# Altium PCB CW308T_M2351_MainPCB.PcbDoc
Units mil, origin at the board's own origin, x right, y up, seen from the top; angles counter-clockwise.
Board outline 2055 x 2540 mil, 2 copper layers (Top Layer, Bottom Layer); 24 components, 22 nets, 174 pads, 47 vias.
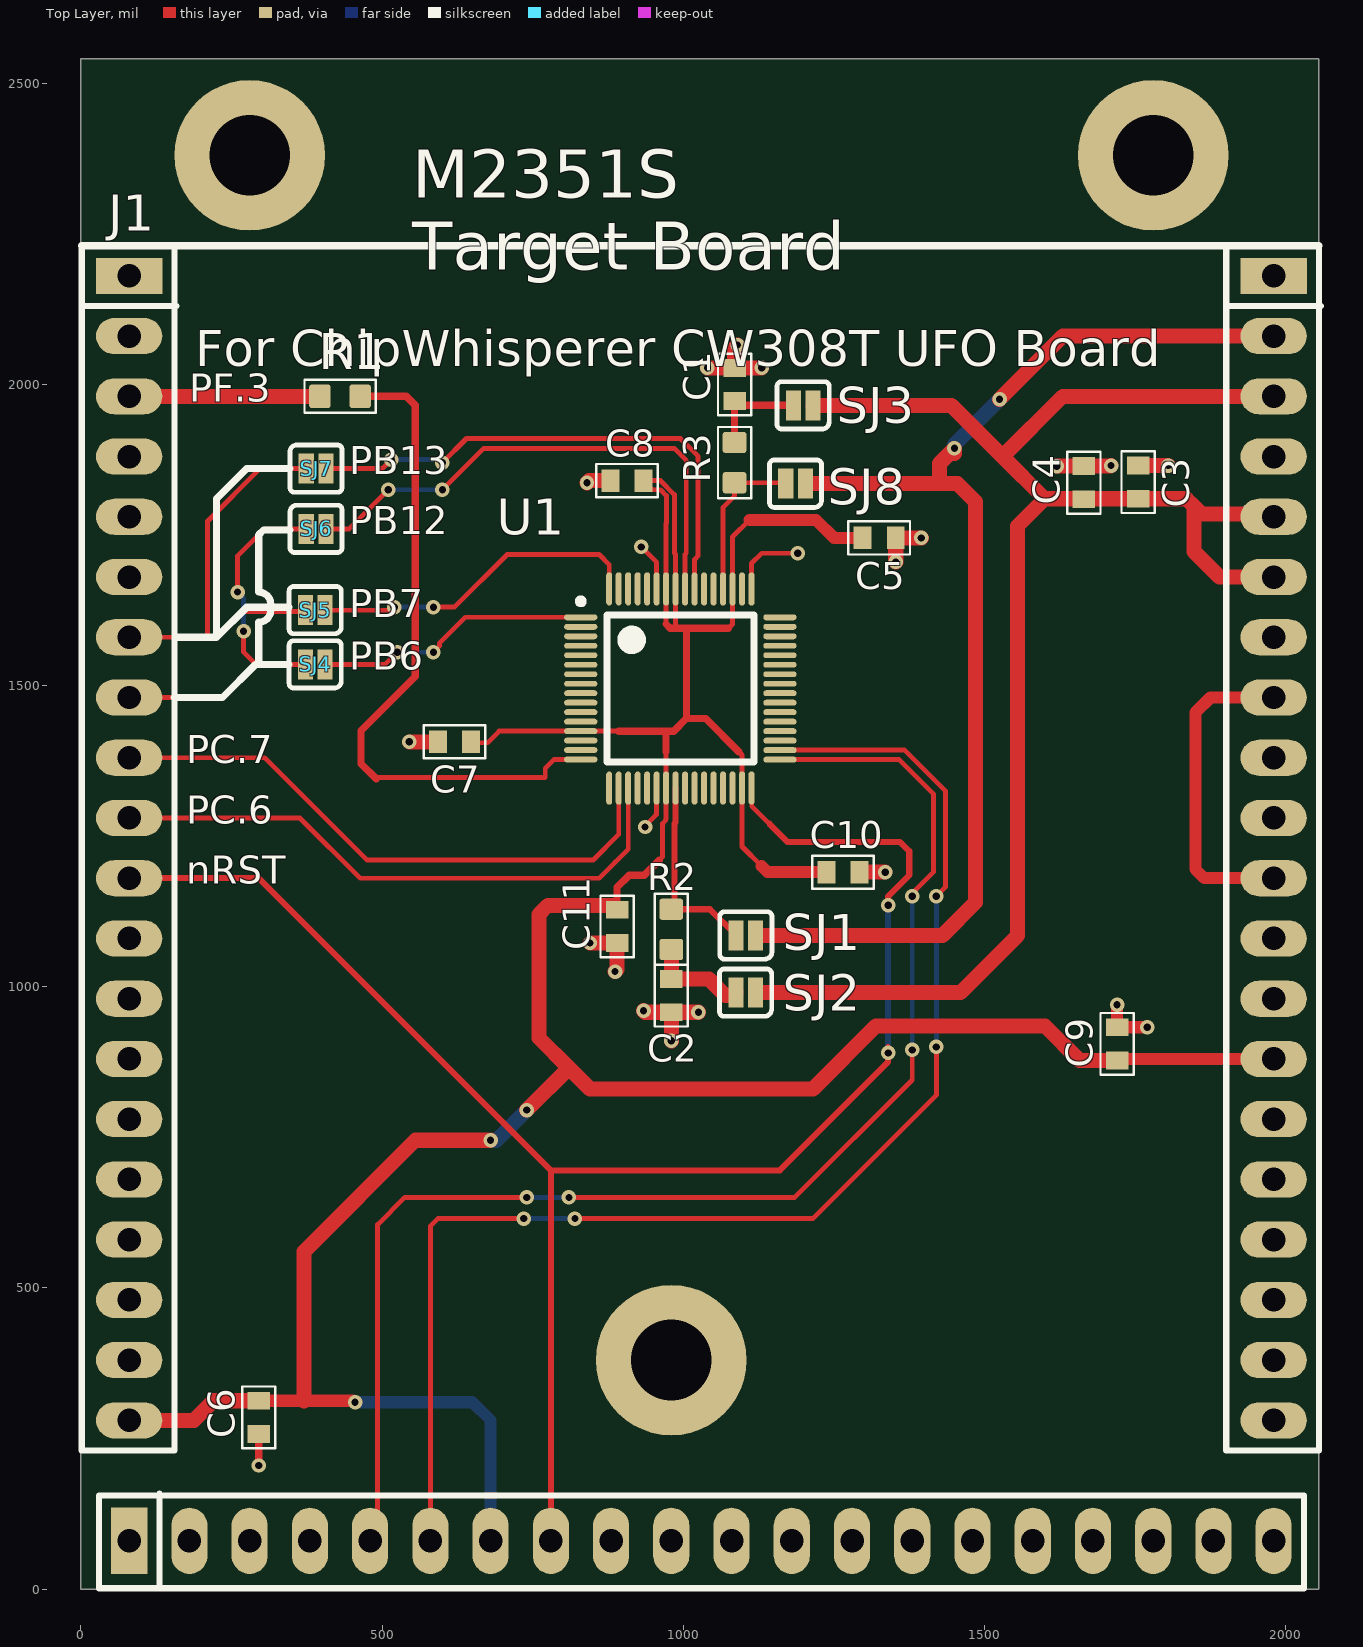
[diagram p0: Top Layer view]
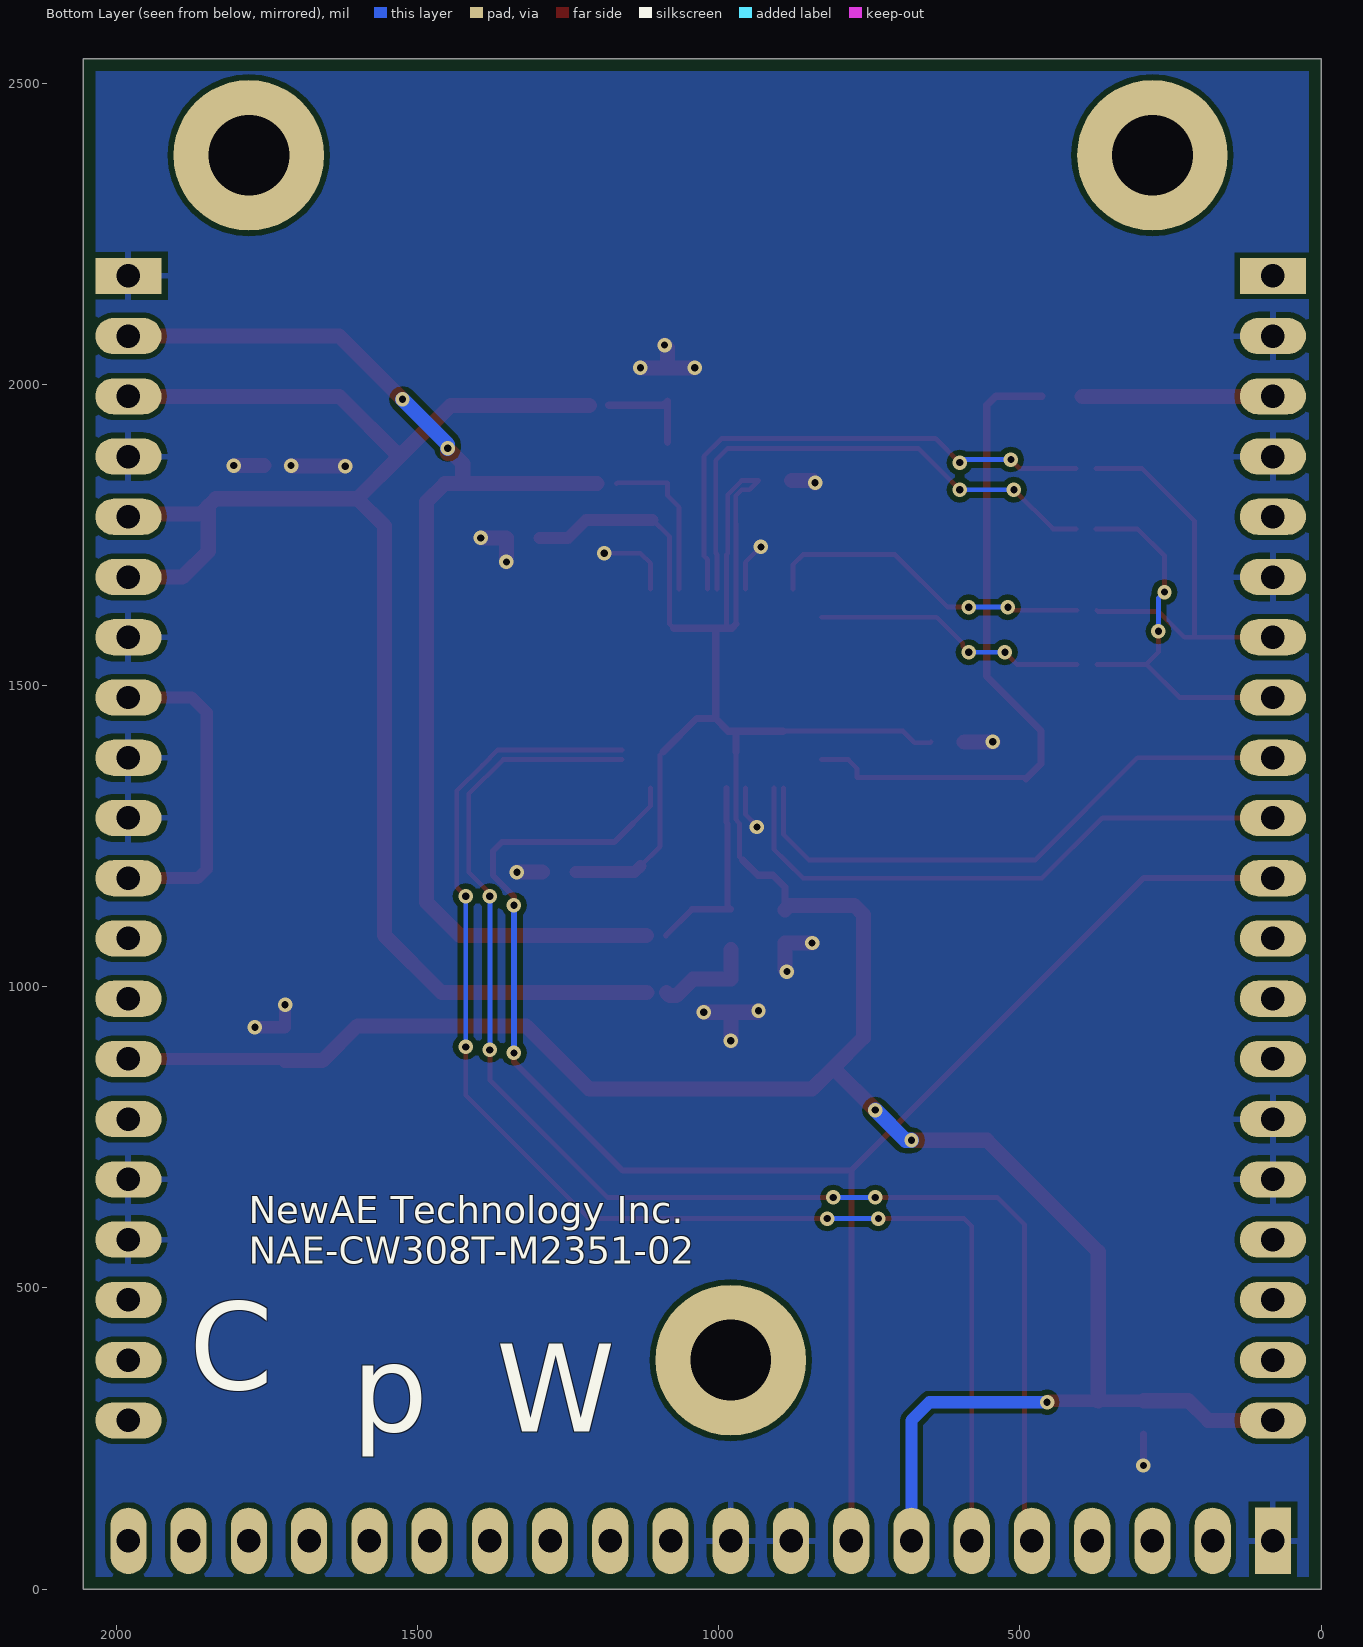
[diagram p1: Bottom Layer view, seen from below]

## Layer stack, top to bottom
Top Solder: solder mask 0.4, Solder Resist, Dk 3.5
Top Layer: signal copper 1.4
Dielectric 1: dielectric 12.6, FR-4, Dk 4.8
Bottom Layer: signal copper 1.4
Bottom Solder: solder mask 0.4, Solder Resist, Dk 3.5

## Board outline
0,0 2055,0 2055,2540 0,2540

## Design rules (kind name [scope] priority, off if disabled: settings)
BoardOutlineClearance Silk_to_Outline [(OnLayer('Top Overlay'))] p1: gap=0 ignorepadtopadclearanceinfootprint=FALSE
BoardOutlineClearance [All] p2: gap=20 ignorepadtopadclearanceinfootprint=FALSE
Clearance Clearance_Power [InNet('+*') OR InNet('-*') OR InNet('GND')] p1: gap=9 ignorepadtopadclearanceinfootprint=FALSE
Clearance [All] p2: gap=6 ignorepadtopadclearanceinfootprint=FALSE except(0: Arc-Hole Track-Hole SMDPad-Hole THPad-Hole Via-Hole Fill-Hole Poly-Hole Region-Hole Text-Hole)
HoleSize [All] p1: absolutevalues=TRUE maxlimit=200 minlimit=1 maxpercent=80.000 minpercent=20.000
MinimumSolderMaskSliver [All] p1: minsoldermaskwidth=5
PlaneConnect PlaneConnect_viaDirect [IsVia] p1: planeconnectstyle=Direct reliefexpansion=20 reliefentries=4 reliefconductorwidth=10 reliefairgap=10
PlaneConnect [All] p2: planeconnectstyle=Relief reliefexpansion=20 reliefentries=4 reliefconductorwidth=10 reliefairgap=10
PolygonConnect PolygonConnect_viaDirect [All vs isVia] p1: connectstyle=Direct reliefconductorwidth=10 reliefentries=4 polygonreliefangle="90 Angle" airgapwidth=10
PolygonConnect [All] p2: connectstyle=Relief reliefconductorwidth=10 reliefentries=4 polygonreliefangle="90 Angle" airgapwidth=10
RoutingVias [All] p1: holewidth=12 width=24 viastyle="Through Hole" minholewidth=12 minwidth=24 maxholewidth=28 maxwidth=100
SilkToSilkClearance [All] p1: silktosilkclearance=5
SilkToSolderMaskClearance [IsPad] p1: minsilkscreentomaskgap=5 clearancetoexposedcopper=TRUE
SolderMaskExpansion [All] p1: expansion=4
Width [All] p1: maxlimit=100 minlimit=6 preferedwidth=8 minimp=50.000000 maximp=50.000000 favimp=50.000000
25 further rules are at their usual default settings.

## Components (designator, comment, footprint, x,y, rotation, side; value= is the part's Value field where it differs from the comment)
C1 "2u2" CAPC0603_M 1085,1999.69 r90 top
C2 "2u2" CAPC0603_M 980,985 r270 top
C3 "100n" CAPC0603_M 1755,1837.44 r90 top
C4 "2u2" CAPC0603_M 1665,1836.54 r90 top
C5 "100n" CAPC0603_M 1325,1745 r0 top
C6 "100n" CAPC0603_M 295,285 r270 top
C7 "100n" CAPC0603_M 620,1406.42 r180 top
C8 "100n" CAPC0603_M 906.42,1840 r180 top
C9 "100n" CAPC0603_M 1720,905 r90 top
C10 "2u2" CAPC0603_M 1265,1190 r0 top
C11 "2u2" CAPC0603_M 890,1100 r270 top
J1 "CW308_TARGETCON" CW308_TBOARD_CONN 80,2180 r0 top locked
R1 "51R" RESC1608X55N 430,1980 r180 top
R2 "10R" RESC1608X55N 980,1095 r270 top
R3 "10R" RESC1608X55N 1085,1870 r90 top
SJ1 "NO" SJ_2S_NO 1103.78,1085 r180 top
SJ2 "NO" SJ_2S_NO 1103.27,990 r180 top
SJ3 "NO" SJ_2S_NO 1198.78,1965 r180 top
SJ4 "NO" SJ_2S_NO 388.78,1535 r180 top
SJ5 "NO" SJ_2S_NO 388.78,1625 r180 top
SJ6 "NC" SJ_2S_NC 390.16,1760 r0 top
SJ7 "NC" SJ_2S_NC 390.16,1860 r0 top
SJ8 "NO" SJ_2S_NO 1186.22,1835 r180 top
U1 "M2351SIAAE" TSQFP40P900X900X160-64N 995,1495 r0 top

## Footprints (in the part's own frame and the unit in brackets; to place one, negate y for a bottom-side part, rotate by r counter-clockwise, add the part's x,y. Pads: shape width x height; smd on the part's side, far side on the other; paste and mask are expansions set on the pad)
CAPC0603_M [mm]
  rect 0.75x0.95 smd: 1(-0.7,0) 2(0.7,0)
  silkscreen extent -1.3,-0.7 1.3,0.7, body extent -0.85,-0.45 0.85,0.45, height 0.9
CW308_TBOARD_CONN [mil]
  rect 110x60 hole 39: A1(0,0) C1(1900,0)
  oval 110x60 hole 39: A2(0,-100) A3(0,-200) A4(0,-300) A5(0,-400) A6(0,-500) A7(0,-600) A8(0,-700) A9(0,-800) A10(0,-900) A11(0,-1000) A12(0,-1100) A13(0,-1200) A14(0,-1300) A15(0,-1400) A16(0,-1500) A17(0,-1600) A18(0,-1700) A19(0,-1800) A20(0,-1900) C2(1900,-100) C3(1900,-200) C4(1900,-300) C5(1900,-400) C6(1900,-500) C7(1900,-600) C8(1900,-700) C9(1900,-800) C10(1900,-900) C11(1900,-1000) C12(1900,-1100) C13(1900,-1200) C14(1900,-1300) C15(1900,-1400) C16(1900,-1500) C17(1900,-1600) C18(1900,-1700) C19(1900,-1800) C20(1900,-1900)
  rect 60x110 hole 39: B1(0,-2100)
  oval 60x110 hole 39: B2(100,-2100) B3(200,-2100) B4(300,-2100) B5(400,-2100) B6(500,-2100) B7(600,-2100) B8(700,-2100) B9(800,-2100) B10(900,-2100) B11(1000,-2100) B12(1100,-2100) B13(1200,-2100) B14(1300,-2100) B15(1400,-2100) B16(1500,-2100) B17(1600,-2100) B18(1700,-2100) B19(1800,-2100) B20(1900,-2100)
  round 250 hole 134: MH1(200,200) MH2(900,-1800) MH2(1700,200)
  silkscreen extent -79,-2179 1979,50, body extent -50,-2149 1950,50, height 48
RESC1608X55N [mm] "Chip Resistor, Body 1.6x0.8mm, EIA 0603, IPC Medium Density"
  round 0.254 on Mech15: 0(0,0)
  rrect25% 0.9x1 smd: 1(-0.85,0) 2(0.85,0)
  Top Layer pour cut-out: -0.6,0.5 0.6,0.5 0.6,-0.5 -0.6,-0.5
  silkscreen extent -1.5,-0.7 1.5,0.7, body extent -0.87,-0.47 0.88,0.48, height 0.54
SJ_2S_NC [mil] "Solder Jumper, closed with solder paste"
  rect 25x50 smd: 1(-16.22,0) 2(16.22,0)
  silkscreen extent -43,-39 43,39
SJ_2S_NO [mil] "Solder Jumper, open (no paste)"
  rect 25x50 smd paste-393.7: 1(-16.22,0) 2(16.22,0)
  silkscreen extent -43,-39 43,39
TSQFP40P900X900X160-64N [mm] "TSQFP, 64-Leads, Body 7.00x7.00mm, Pitch 0.40mm, IPC Medium Density"
  oval 1.4x0.25 smd: 1(-4.2,3) 2(-4.2,2.6) 3(-4.2,2.2) 4(-4.2,1.8) 5(-4.2,1.4) 6(-4.2,1) 7(-4.2,0.6) 8(-4.2,0.2) 9(-4.2,-0.2) 10(-4.2,-0.6) 11(-4.2,-1) 12(-4.2,-1.4) 13(-4.2,-1.8) 14(-4.2,-2.2) 15(-4.2,-2.6) 16(-4.2,-3) 33(4.2,-3) 34(4.2,-2.6) 35(4.2,-2.2) 36(4.2,-1.8) 37(4.2,-1.4) 38(4.2,-1) 39(4.2,-0.6) 40(4.2,-0.2) 41(4.2,0.2) 42(4.2,0.6) 43(4.2,1) 44(4.2,1.4) 45(4.2,1.8) 46(4.2,2.2) 47(4.2,2.6) 48(4.2,3)
  oval 0.25x1.4 smd: 17(-3,-4.2) 18(-2.6,-4.2) 19(-2.2,-4.2) 20(-1.8,-4.2) 21(-1.4,-4.2) 22(-1,-4.2) 23(-0.6,-4.2) 24(-0.2,-4.2) 25(0.2,-4.2) 26(0.6,-4.2) 27(1,-4.2) 28(1.4,-4.2) 29(1.8,-4.2) 30(2.2,-4.2) 31(2.6,-4.2) 32(3,-4.2) 49(3,4.2) 50(2.6,4.2) 51(2.2,4.2) 52(1.8,4.2) 53(1.4,4.2) 54(1,4.2) 55(0.6,4.2) 56(0.2,4.2) 57(-0.2,4.2) 58(-0.6,4.2) 59(-1,4.2) 60(-1.4,4.2) 61(-1.8,4.2) 62(-2.2,4.2) 63(-2.6,4.2) 64(-3,4.2)
  silkscreen extent -4.32,-3.1 3.1,3.8, body extent -4.5,-4.5 4.5,4.5, height 1.6

## Part data
C1 C2 C4 C10 C11: library part CCHIP-2u2-0603, "2u2, 0603", Case-EIA=0603, Case-Metric=1608, Manufacture 1=Samsung, Manufacture Part Number 1=CL10B225KP8NNNC, Rated Voltage=10VDC, Supplier Part Number 1=1276-1134-2-ND, Component Group=Capacitor, Component Type=Standard, Mounting Technology=SMT, Part Number=CCHIP-2u2-0603, Pin Count=2, Supplier 1=Digi-Key
C3 C5 C6 C7 C8 C9: library part CCHIP-100n-0603, "100n, 0603", Case-EIA=0603, Case-Metric=1608, Manufacture 1=Kemet, Manufacture Part Number 1=C0603C104K5RACTU, Rated Voltage=50VDC, Supplier Part Number 1=399-5089-2-ND, Component Group=Capacitor, Component Type=Standard, Mounting Technology=SMT, Part Number=CCHIP-100n-0603, Pin Count=2, Supplier 1=Digi-Key
J1: library part CW308_TBOARD, "CW308 \"Standard\" Target Board Connector", Component Group=Mechanical, Component Type=Standard, Mounting Technology=Through-hole, Part Number=CW308_TBOARD, Pin Count=60, Pitch=2.54mm
R1: library part RCHIP-51R-0603, "51R res, 0603, 1%, 1/10W", Case-EIA=0603, Case-Metric=1608, Manufacture 1=Yageo, Manufacture Part Number 1=RC0603FR-0751RL, Rated Power=0.1W, Rated Voltage=75VDC, Supplier Part Number 1=311-51.0HRCT-ND, Temperature Range="-55C to 155C", Tolerance=1%, Component Group=Resistor, Component Type=Standard, Mounting Technology=SMT, Part Number=RCHIP-51R-0603, Pin Count=2, Supplier 1=Digi-Key
R2 R3: library part RCHIP-10R-0603, "10R res, 0603, 1%, 1/10W", Case-EIA=0603, Case-Metric=1608, Manufacture 1=Yageo, Manufacture Part Number 1=RC0603FR-0710RL, Rated Power=0.1W, Rated Voltage=75VDC, Supplier Part Number 1=311-10.0HRCT-ND, Temperature Range="-55C to 155C", Tolerance=1%, Component Group=Resistor, Component Type=Standard, Mounting Technology=SMT, Part Number=RCHIP-10R-0603, Pin Count=2, Supplier 1=Digi-Key
SJ1 SJ2 SJ3 SJ4 SJ5 SJ8: library part SJ_2S_NO, "Solder Jumper, NO", Component Group="PCB Feature", Component Type="Standard (No BOM)", Mounting Technology=COPPER, Part Number=SJ_2S_NO, Pin Count=2
SJ6 SJ7: library part SJ_2S, "Solder Jumper, NC", Component Group="PCB Feature", Component Type="Standard (No BOM)", Mounting Technology=COPPER, Part Number=SJ_2S, Pin Count=2
U1: "Cortex M23 Device, QFP64", Manufacture 1=Nuvoton, Component Group="Digital IC", Component Type=Standard, Manufacture Part Number 1=M2351SIAAE, Part Number=M2351SIAAE, Pin Count=64, PP Material Stack=0, PP Rotation=0

## Via types
v1: diameter 24, hole 12, Top Layer to Bottom Layer, 47 vias

## Nets (pads, with @x,y where several pads share a name; then routed paths per layer and width w, separated by ;. In a path a pad name is that pad's centre, name@x,y a point inside that pad or via, vN(x,y) a via of type N, cw(c..) or ccw(c..) an arc to the next point about the centre after c; other vN are vias at no path point)
CLKIN: J1.A3 R1.2 | length 316.5
  Top Layer w25: J1.A3 R1.2
GND: C1.2 C2.2 C3.2 C4.2 C5.2 C6.2 C7.2 C8.2 C9.2 C10.2 C11.2 J1.A2 J1.A4 J1.A6 J1.A15 J1.A16 J1.B1 J1.B9 J1.B10 J1.C1 J1.C4 J1.C7 J1.C9 J1.C10 J1.C16 J1.C17 U1.22 U1.49 U1.59 | length 1134.4
  Top Layer w8: v1(930,1730) 955.63,1704.37 U1.59 ; v1(936.54,1265) 936.54,1266.81 954.38,1284.65 954.38,1285.91 ; 955.63,1285.91 U1.22 ; U1.49 1113.11,1702.52 1130,1719.41 v1(1190,1719.41)
  Top Layer w12: v1(295,205) C6.2
  Top Layer w20: v1(1720,970) C9.2 v1(1770,932.56)
  Top Layer w25: v1(545,1406.42) C7.2 ; v1(840,1836.54) 843.46,1840 C8.2 ; v1(845,1072.44) C11.2 890,1028.27 v1(886.73,1025) ; v1(933.98,960) 936.54,957.44 C2.2 ; v1(980,910) C2.2 ; v1(1025,957.44) C2.2 ; v1(1040,2027.24) C1.2 ; v1(1090,2065) 1085,2060 C1.2 ; v1(1130,2027.24) C1.2 ; C10.2 v1(1335,1190) ; v1(1352.56,1705) C5.2 v1(1395,1745) ; v1(1620,1864.09) C4.2 1709.09,1864.09 v1(1710,1865) ; C3.2 v1(1805,1865)
GPIO1: J1.A7 SJ5.2 SJ7.1 | length 704.2
  Top Layer w8: J1.A7 210,1580 ; SJ5.2 370.52,1622.95 270,1622.95 227.05,1580 210,1580 ; SJ7.1 297.05,1860 210,1772.95 210,1580
GPIO2: J1.A8 SJ4.2 SJ6.1 | length 640.4
  Top Layer w8: J1.A8 235,1480 290,1535 ; v1(260,1655) 260,1715 305,1760 SJ6.1 ; v1(270,1590) 270,1555 290,1535 ; SJ4.2 290,1535
  Bottom Layer w8: v1(260,1655) 270,1645 v1(270,1590)
GPIO3: J1.A9 U1.18 | length 977.7
  Top Layer w8: J1.A9 305,1380 475,1210 850,1210 892.64,1252.64 U1.18
GPIO4: J1.A10 U1.19 | length 991.1
  Top Layer w8: J1.A10 363.46,1280 463.46,1180 860,1180 886.73,1206.73 908.39,1228.39 U1.19
NetC1_1: C1.1 R3.2 SJ3.2 | length 169.2
  Top Layer w12: R3.2 C1.1 1092.13,1965 SJ3.2
NetC2_1: C2.1 R2.2 SJ2.2 | length 169.5
  Top Layer w25: R2.2 C2.1 1042.44,1012.56 1070,985 1082.05,985 SJ2.2
NetJ1_C8: J1.C8 J1.C11 | length 536.6
  Top Layer w20: J1.C11 1865,1180 1850,1195 1850,1455 1875,1480 J1.C8
NetR1_1: R1.1 U1.16 | length 1127.2
  Top Layer w8: 490,1345 492.36,1347.36 770.59,1347.36 770.59,1362.64 784.84,1376.89 U1.16
  Top Layer w12: R1.1 540,1980 555,1965 555,1515 465,1425 465,1370 490,1345
NetR2_1: R2.1 SJ1.2 U1.24 | length 329.7
  Top Layer w10: U1.24 987.13,1272.56 985.16,1270.59 985.16,1133.62 R2.1 1044.1,1128.46 SJ1.2
NetR3_1: R3.1 SJ8.2 U1.52 | length 269.7
  Top Layer w8: U1.52 1065.87,1795.87 1085,1815 R3.1 1168.46,1836.54 SJ8.2
nRESET: J1.A11 J1.B8 U1.32 | length 2847.5
  Top Layer w8: U1.32 1113.46,1329.29 1113.46,1299.77 1142.64,1270.59
  Top Layer w10: J1.A11 295,1180 780,695 ; J1.B8 780,695 ; 1142.64,1270.59 1173.23,1240 1360,1240 1375,1225 1375,1185 1340,1150 v1(1340,1135) ; v1@1340,900 v1(1340,890) 1340,875 1160,695 780,695
  Bottom Layer w10: v1(1340,890) v1(1340,1135)
SHUNTH: C3.1 C4.1 J1.C3 J1.C5 J1.C6 SJ2.1 SJ3.1 | length 2776.7
  Top Layer w25: SJ2.1 1460,990 1555,1085 1555,1765 1600,1810 ; SJ3.1 1445,1965 1530,1880 ; J1.C6 1890,1680 1847.5,1722.5 1847.5,1797.5 ; J1.C5 1975,1785 1860,1785 1847.5,1797.5 ; J1.C3 1630,1980 1530,1880 ; 1530,1880 1600,1810 ; 1600,1810 1835,1810 1847.5,1797.5
SHUNTL: J1.C2 SJ1.1 SJ8.1 | length 2036.3
  Top Layer w25: SJ1.1 1430,1085 1485,1140 1485,1805 1455,1835 1425,1835 ; SJ8.1 1425,1835 ; v1@1450,1885 v1(1450,1893.62) 1425,1868.62 1425,1835 ; v1(1525,1975) 1630,2080 J1.C2
  Bottom Layer w25: v1(1450,1893.62) 1450,1900 v1(1525,1975)
SWDCLK: J1.B6 U1.34 | length 2266.5
  Top Layer w8: J1.B6 580,602.56 592.44,615 v1(735,615) ; v1(820,615) 1215,615 1420,820 v1(1420,900) ; U1.34 1367.36,1392.64 1392.95,1367.05 1435,1325 1435,1165 v1(1420,1150)
  Bottom Layer w8: v1(735,615) v1(820,615) ; v1(1420,900) v1(1420,1150)
SWDIO: J1.B5 U1.33 | length 2284.9
  Top Layer w8: J1.B5 492.36,92.36 492.36,605 537.36,650 v1(740,650) ; v1(810,650) 1185,650 1380,845 v1(1380,895) ; U1.33 1358.11,1376.89 1415,1320 1415,1190 1380,1155 v1(1380,1150)
  Bottom Layer w8: v1(740,650) v1(810,650) ; v1(1380,895) v1(1380,1150)
UART0_RXD_ISP: SJ6.2 U1.56 | length 876.4
  Top Layer w8: SJ6.2 445,1760 v1(510,1825) ; v1(600,1825) 668.62,1893.62 985.16,1893.62 1004.84,1873.94 1004.84,1719.41 1002.87,1717.44 U1.56
  Bottom Layer w8: v1(510,1825) v1(600,1825)
UART0_TXD_ISP: SJ7.2 U1.55 | length 877.8
  Top Layer w8: SJ7.2 500,1860 v1(515,1875) ; v1(600,1870) 640,1910 995,1910 1024.53,1880.47 1024.53,1715 1018.62,1709.09 U1.55
  Bottom Layer w8: v1(515,1875) 595,1875 v1(600,1870)
UART1_RXD_SISP: SJ4.1 U1.1 | length 459.9
  Top Layer w8: SJ4.1 505,1535 v1(525,1555) ; v1(585,1555) 595,1565 595,1570 638.11,1613.11 U1.1
  Bottom Layer w8: v1(525,1555) v1(585,1555)
UART1_TXD_SISP: SJ5.1 U1.64 | length 567.4
  Top Layer w8: SJ5.1 525,1625 v1(520,1630) ; v1(585,1630) 620,1630 707.44,1717.44 860,1717.44 876.89,1700.55 U1.64
  Bottom Layer w8: v1(520,1630) v1(585,1630)
VCC: C5.1 C6.1 C7.1 C8.1 C9.1 C10.1 C11.1 J1.A20 J1.B7 J1.C14 U1.13 U1.23 U1.31 U1.51 U1.57 U1.58 | length 5653.8
  Top Layer w8: C7.1 648.98,1405 675,1405 694.13,1424.13 U1.13 892.64,1424.13 ; 960,1210 965.47,1215.47 965.47,1270.59 970.16,1275.28 970.16,1276.8 971.38,1278.02 U1.23 971.38,1390 ; 971.38,1602.03 U1.58 971.38,1768.82 971.79,1769.23 971.79,1815.22 962.01,1825 948.98,1825 C8.1 962.01,1840 985.16,1816.85 985.16,1719.41 987.13,1717.44 U1.57 987.13,1597.87 990,1595 ; 1075,1595 1081.61,1601.61 U1.51 1081.61,1746.61 1110,1775 ; 1092.13,1390 1097.36,1384.76 U1.31 1097.36,1232.64 1130,1200
  Top Layer w12: C11.1 890,1165 910,1185 935,1185 960,1210 ; 892.64,1424.13 975,1424.13 ; 971.38,1390 971.38,1420.51 975,1424.13 ; 971.38,1602.03 978.41,1595 990,1595 1005,1595 ; 1075,1595 1005,1595 ; 1092.13,1390 1037.13,1445 1005,1445 ; 975,1424.13 984.13,1424.13 1005,1445 ; 1005,1445 1005,1595
  Top Layer w20: C6.1 370,312.56 452.44,312.56 v1(455,310) ; 1110,1775 1220,1775 1250,1745 C5.1 ; 1130,1200 1140,1190 C10.1 ; C9.1 1722.56,880 J1.C14
  Top Layer w25: J1.A20 187.44,280 220,312.56 C6.1 ; 370,312.56 370,560 555,745 v1(680,745) ; v1(740,795) 810,865 ; C11.1 882.56,1135 775,1135 760,1120 760,915 810,865 ; C9.1 1657.56,877.44 1600,935 1320,935 1215,830 845,830 810,865
  Bottom Layer w20: v1(455,310) 650,310 680,280 J1.B7
  Bottom Layer w25: v1(680,745) 690,745 v1(740,795)
pads on no net: J1.A1 J1.A5 J1.A12 J1.A13 J1.A14 J1.A17 J1.A18 J1.A19 J1.B2 J1.B3 J1.B4 J1.B11 J1.B12 J1.B13 J1.B14 J1.B15 J1.B16 J1.B17 J1.B18 J1.B19 J1.B20 J1.C12 J1.C13 J1.C15 J1.C18 J1.C19 J1.C20 J1.MH1 J1.MH2 R1.0 R2.0 R3.0 U1.2 U1.3 U1.4 U1.5 U1.6 U1.7 U1.8 U1.9 U1.10 U1.11 U1.12 U1.14 U1.15 U1.17 U1.20 U1.21 U1.25 U1.26 U1.27 U1.28 U1.29 U1.30 U1.35 U1.36 U1.37 U1.38 U1.39 U1.40 U1.41 U1.42 U1.43 U1.44 U1.45 U1.46 U1.47 U1.48 U1.50 U1.53 U1.54 U1.60 U1.61 U1.62 U1.63

## Polygon pours and split planes (outlines as drawn)
GND on Bottom Layer "GND_L02_P000" (solid, pour order 0): -130,2680 -125,2675 2230,2675 2230,-85 2100,-215 -130,-215

## Silkscreen, mask and mechanical layers (free items; w line width, h text height)
Top Overlay:
  lines w11.81: 1.26,2230 2055,2230
  lines w12: 155,1480 235,1480 290,1535 345,1535 ; 160,1580 225,1580 ; 295,1540 295,1605 ccw(c295,1625) 315,1625 315,1635 ccw(c295,1635) 295,1655 295,1750 303.03,1758.03 346.85,1758.03 ; 345,1630 275,1630 225,1580 ; 346.85,1860 275,1860 225,1810 225,1580
  text "M2351S / Target Board" at 550,2190 h80
  text "For ChipWhisperer CW308T UFO Board" at 190,2030 h60
  text "PF.3" at 180,1955 h80
  text "PB13" at 445,1835 h80
  text "PB12" at 445,1735 h80
  text "PB7" at 445,1597.44 h80
  text "PB6" at 445,1510 h80
  text "PC.7" at 175,1355 h80
  text "PC.6" at 175,1255 h80
  text "nRST" at 175,1155 h80
Bottom Overlay:
  text "NewAE Technology Inc. / NAE-CW308T-M2351-02" at 1780,540 h45
  text "C" at 1879,283 h250
  text "W" at 1369,213 h250
  text "p" at 1609,213 h250
Mechanical 1:
  the board outline again, w10